# EAGLE board sdr_rx (EAGLE 9.6.1)
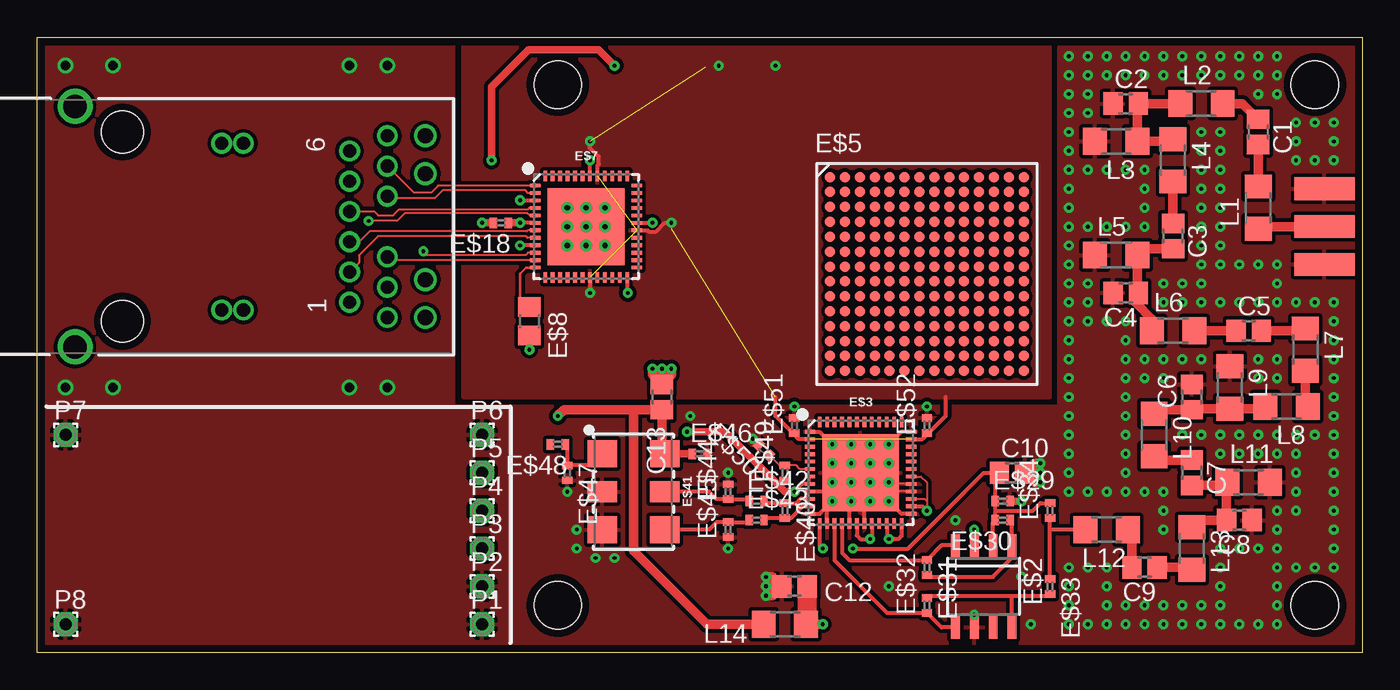
[diagram p0: board, top side]
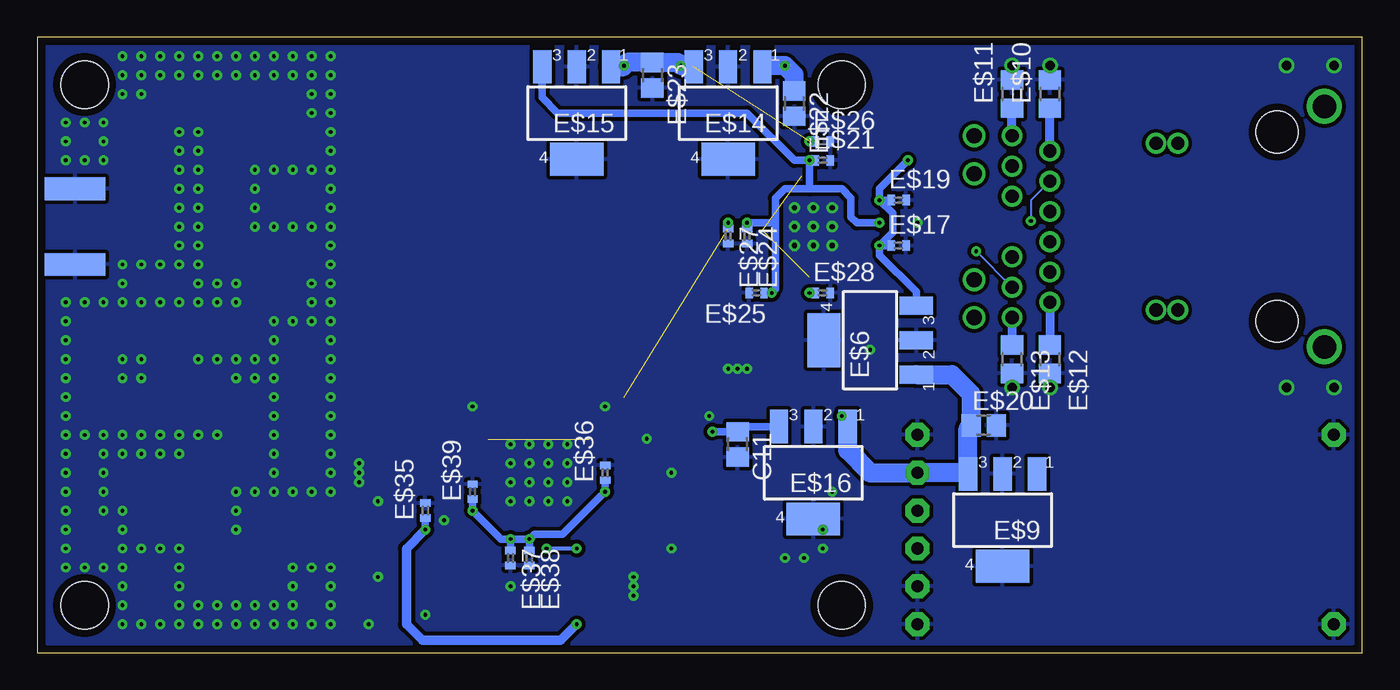
[diagram p1: board, bottom side, seen from below]

Size 88.9 x 41.27 mm. Coordinates in mm from the lower left corner, seen from the top.
Outline: 0,0 0,41.27 88.9,41.27 88.9,0 0,0
Copper layers (1*16): Top 0.035mm / dielectric 0.5mm / Bottom 0.035mm
Design rules "33each": minimum track width 5mil, minimum drill 10mil, track to track 5mil, track to pad 5mil, pad to pad 5mil, via to via 5mil, smd to smd 5mil, copper to edge 20mil, drill to drill 8mil, minimum pad ring 10mil, minimum via ring 8mil, stop-mask expansion 4mil, vias tented up to drill 0mil, thermal gap 10mil
Holes 3.17 mm at 34.92,38.1 34.92,3.17 85.72,38.1 85.72,3.17

## Footprints (pad centres in the part's own frame; a part is rotated, then mirrored left to right if it is on the bottom)
R0805 = smd 1.3 x 1.5: 1 -0.85,0; 2 0.85,0
SMA-EDGE = smd 1.524 x 4.064: GND@0 0,0; GND@1 5.08,0; SIG 2.54,0 | smd 1.524 x 4.064 bottom: GND@2 0,0; GND@3 5.08,0
SOIC8 = smd 0.6 x 1.5: 1 -1.905,-2.75; 2 -0.635,-2.75; 3 0.635,-2.75; 4 1.905,-2.75; 5 1.905,2.75; 6 0.635,2.75; 7 -0.635,2.75; 8 -1.905,2.75
QFN-48 = smd 0.7 x 0.25: 1 -3.4,2.75; 2 -3.4,2.25; 3 -3.4,1.75; 4 -3.4,1.25; 5 -3.4,0.75; 6 -3.4,0.25; 7 -3.4,-0.25; 8 -3.4,-0.75; 9 -3.4,-1.25; 10 -3.4,-1.75; 11 -3.4,-2.25; 12 -3.4,-2.75; 25 3.4,-2.75; 26 3.4,-2.25; 27 3.4,-1.75; 28 3.4,-1.25; 29 3.4,-0.75; 30 3.4,-0.25; 31 3.4,0.25; 32 3.4,0.75; 33 3.4,1.25; 34 3.4,1.75; 35 3.4,2.25; 36 3.4,2.75 | smd 0.25 x 0.7: 13 -2.75,-3.4; 14 -2.25,-3.4; 15 -1.75,-3.4; 16 -1.25,-3.4; 17 -0.75,-3.4; 18 -0.25,-3.4; 19 0.25,-3.4; 20 0.75,-3.4; 21 1.25,-3.4; 22 1.75,-3.4; 23 2.25,-3.4; 24 2.75,-3.4; 37 2.75,3.4; 38 2.25,3.4; 39 1.75,3.4; 40 1.25,3.4; 41 0.75,3.4; 42 0.25,3.4; 43 -0.25,3.4; 44 -0.75,3.4; 45 -1.25,3.4; 46 -1.75,3.4; 47 -2.25,3.4; 48 -2.75,3.4 | smd 5.15 x 5.15: EP 0,0
7499811420 = drill 0.89: 1 -5.075,-15.24; 2 -3.045,-15.24; 3 -1.015,-15.24; 4 1.015,-15.24; 5 3.045,-15.24; 6 5.075,-15.24; 7 -6.09,-17.78; 8 -4.06,-17.78; 9 -2.03,-17.78; 10 2.03,-17.78; 11 4.06,-17.78; 12 6.09,-17.78 | drill 0.89 pad 1.335: 13 -5.59,-8.12; 14 5.59,-8.12; 15 -5.59,-6.66; 16 5.59,-6.66 | drill 1.02: 17 -6.09,-20.32; 18 -3.555,-20.32; 19 3.555,-20.32; 20 6.09,-20.32 | drill 1.57: Z1 -8.065,3.18; Z2 8.065,3.18 | hole 2.8: -6.35,0; 6.35,0
PBGA196 = smd 0.7 x 0.7: A1 -6.5,6.5; A2 -5.5,6.5; A3 -4.5,6.5; A4 -3.5,6.5; A5 -2.5,6.5; A6 -1.5,6.5; A7 -0.5,6.5; A8 0.5,6.5; A9 1.5,6.5; A10 2.5,6.5; A11 3.5,6.5; A12 4.5,6.5; A13 5.5,6.5; A14 6.5,6.5; B1 -6.5,5.5; B2 -5.5,5.5; B3 -4.5,5.5; B4 -3.5,5.5; B5 -2.5,5.5; B6 -1.5,5.5; B7 -0.5,5.5; B8 0.5,5.5; B9 1.5,5.5; B10 2.5,5.5; B11 3.5,5.5; B12 4.5,5.5; B13 5.5,5.5; B14 6.5,5.5; C1 -6.5,4.5; C2 -5.5,4.5; C3 -4.5,4.5; C4 -3.5,4.5; C5 -2.5,4.5; C6 -1.5,4.5; C7 -0.5,4.5; C8 0.5,4.5; C9 1.5,4.5; C10 2.5,4.5; C11 3.5,4.5; C12 4.5,4.5; C13 5.5,4.5; C14 6.5,4.5; D1 -6.5,3.5; D2 -5.5,3.5; D3 -4.5,3.5; D4 -3.5,3.5; D5 -2.5,3.5; D6 -1.5,3.5; D7 -0.5,3.5; D8 0.5,3.5; D9 1.5,3.5; D10 2.5,3.5; D11 3.5,3.5; D12 4.5,3.5; D13 5.5,3.5; D14 6.5,3.5; E1 -6.5,2.5; E2 -5.5,2.5; E3 -4.5,2.5; E4 -3.5,2.5; E5 -2.5,2.5; E6 -1.5,2.5; E7 -0.5,2.5; E8 0.5,2.5; E9 1.5,2.5; E10 2.5,2.5; E11 3.5,2.5; E12 4.5,2.5; E13 5.5,2.5; E14 6.5,2.5; F1 -6.5,1.5; F2 -5.5,1.5; F3 -4.5,1.5; F4 -3.5,1.5; F5 -2.5,1.5; F6 -1.5,1.5; F7 -0.5,1.5; F8 0.5,1.5; F9 1.5,1.5; F10 2.5,1.5; F11 3.5,1.5; F12 4.5,1.5; F13 5.5,1.5; F14 6.5,1.5; G1 -6.5,0.5; G2 -5.5,0.5; G3 -4.5,0.5; G4 -3.5,0.5; G5 -2.5,0.5; G6 -1.5,0.5; G7 -0.5,0.5; G8 0.5,0.5; G9 1.5,0.5; G10 2.5,0.5; G11 3.5,0.5; G12 4.5,0.5; G13 5.5,0.5; G14 6.5,0.5; H1 -6.5,-0.5; H2 -5.5,-0.5; H3 -4.5,-0.5; H4 -3.5,-0.5; H5 -2.5,-0.5; H6 -1.5,-0.5; H7 -0.5,-0.5; H8 0.5,-0.5; H9 1.5,-0.5; H10 2.5,-0.5; H11 3.5,-0.5; H12 4.5,-0.5; H13 5.5,-0.5; H14 6.5,-0.5; J1 -6.5,-1.5; J2 -5.5,-1.5; J3 -4.5,-1.5; J4 -3.5,-1.5; J5 -2.5,-1.5; J6 -1.5,-1.5; J7 -0.5,-1.5; J8 0.5,-1.5; J9 1.5,-1.5; J10 2.5,-1.5; J11 3.5,-1.5; J12 4.5,-1.5; J13 5.5,-1.5; J14 6.5,-1.5; K1 -6.5,-2.5; K2 -5.5,-2.5; K3 -4.5,-2.5; K4 -3.5,-2.5; K5 -2.5,-2.5; K6 -1.5,-2.5; K7 -0.5,-2.5; K8 0.5,-2.5; K9 1.5,-2.5; K10 2.5,-2.5; K11 3.5,-2.5; K12 4.5,-2.5; K13 5.5,-2.5; K14 6.5,-2.5; L1 -6.5,-3.5; L2 -5.5,-3.5; L3 -4.5,-3.5; L4 -3.5,-3.5; L5 -2.5,-3.5; L6 -1.5,-3.5; L7 -0.5,-3.5; L8 0.5,-3.5; L9 1.5,-3.5; L10 2.5,-3.5; L11 3.5,-3.5; L12 4.5,-3.5; L13 5.5,-3.5; L14 6.5,-3.5; M1 -6.5,-4.5; M2 -5.5,-4.5; M3 -4.5,-4.5; M4 -3.5,-4.5; M5 -2.5,-4.5; M6 -1.5,-4.5; M7 -0.5,-4.5; M8 0.5,-4.5; M9 1.5,-4.5; M10 2.5,-4.5; M11 3.5,-4.5; M12 4.5,-4.5; M13 5.5,-4.5; M14 6.5,-4.5; N1 -6.5,-5.5; N2 -5.5,-5.5; N3 -4.5,-5.5; N4 -3.5,-5.5; N5 -2.5,-5.5; N6 -1.5,-5.5; N7 -0.5,-5.5; N8 0.5,-5.5; N9 1.5,-5.5; N10 2.5,-5.5; N11 3.5,-5.5; N12 4.5,-5.5; N13 5.5,-5.5; N14 6.5,-5.5; P1 -6.5,-6.5; P2 -5.5,-6.5; P3 -4.5,-6.5; P4 -3.5,-6.5; P5 -2.5,-6.5; P6 -1.5,-6.5; P7 -0.5,-6.5; P8 0.5,-6.5; P9 1.5,-6.5; P10 2.5,-6.5; P11 3.5,-6.5; P12 4.5,-6.5; P13 5.5,-6.5; P14 6.5,-6.5
SOT223 = smd 1.219 x 2.235: 1 -2.311,-3.099; 2 0,-3.099; 3 2.311,-3.099 | smd 3.6 x 2.2: 4 0,3.099
R0805' = smd 1.3 x 1.5: 1 -0.95,0; 2 0.95,0
R0402 = smd 0.5 x 0.7: 1 -0.5,0; 2 0.5,0
OSCILLATOR-SMD-7.5X5.2-6PIN = smd 1.8 x 2: 1 -2.54,-2.1; 2 2.54,-2.1; 3 2.54,2.1; 4 -2.54,2.1 | smd 1.4 x 2: NC0 0,-2.1; NC1 0,2.1
R1206 = smd 1.6 x 1.803: 1 -1.422,0; 2 1.422,0
1,6/0,8 = drill 0.813 pad 1.6 octagon: 1 0,0

## Placement (x,y rotation side)
C1  82p  [R0805]  81.92,34.92 270 top
C2  130p  [R0805]  73.03,36.83 0 top
C3  22p  [R0805]  76.2,27.94 270 top
C4  220p  [R0805]  73.03,24.13 180 top
C5  16p  [R0805]  81.28,21.59 0 top
C6  220p  [R0805]  77.47,17.14 90 top
C7  22p  [R0805]  77.47,12.06 270 top
C8  130p  [R0805]  80.64,8.89 180 top
C9  82p  [R0805]  74.3,5.71 180 top
C10  82p  [R0805]  65.41,12.06 0 top
C11  82p  [R0805]  41.91,13.97 270 bottom
C12  82p  [R0805]  50.8,4.45 180 top
C13  82p  [R0805]  41.91,17.14 90 top
E$1  [SMA-EDGE]  86.36,26.04 90 top
E$2  [SOIC8]  63.5,4.45 180 top
E$3  [QFN-48]  55.24,12.06 0 top
E$4  [7499811420]  5.71,28.57 90 top
E$5  [PBGA196]  59.69,25.4 0 top
E$6  [SOT223]  33.02,20.95 90 bottom
E$7  [QFN-48]  36.83,28.57 0 top
E$8  [R0805']  33.02,22.23 270 top
E$9  [SOT223]  24.13,8.89 180 bottom
E$10  [R0805']  20.95,37.47 90 bottom
E$11  [R0805']  23.5,37.47 90 bottom
E$12  [R0805']  20.95,19.68 270 bottom
E$13  [R0805']  23.5,19.68 270 bottom
E$14  [SOT223]  42.55,36.2 180 bottom
E$15  [SOT223]  52.7,36.2 180 bottom
E$16  [SOT223]  36.83,12.06 180 bottom
E$17  [R0402]  31.11,27.3 0 bottom
E$18  [R0402]  31.11,28.83 180 top
E$19  [R0402]  31.11,30.35 0 bottom
E$20  [R0805]  25.4,15.24 0 bottom
E$21  [R0402]  36.2,33.02 0 bottom
E$22  [R0805]  38.1,36.83 270 bottom
E$23  [R0805]  47.62,38.73 270 bottom
E$24  [R0402]  41.27,27.94 270 bottom
E$25  [R0402]  40.64,24.13 180 bottom
E$26  [R0402]  36.2,34.29 0 bottom
E$27  [R0402]  42.55,27.94 270 bottom
E$28  [R0402]  36.2,24.13 0 bottom
E$29  [R0402]  64.77,10.16 0 top
E$30  [R0402]  64.77,8.89 180 top
E$31  [R0402]  59.69,5.71 270 top
E$32  [R0402]  59.69,3.17 90 top
E$33  [R0402]  67.94,4.45 270 top
E$34  [R0402]  67.94,9.53 90 top
E$35  [R0402]  62.87,9.53 90 bottom
E$36  [R0402]  50.8,12.06 90 bottom
E$37  [R0402]  57.15,6.35 270 bottom
E$38  [R0402]  55.88,6.35 270 bottom
E$39  [R0402]  59.69,10.79 90 bottom
E$40  [R0402]  50.16,9.53 270 top
E$41  [OSCILLATOR-SMD-7.5X5.2-6PIN]  40.01,10.79 270 top
E$42  [R0402]  48.26,10.16 0 top
E$43  [R0402]  48.26,8.89 0 top
E$44  [R0402]  46.35,10.79 90 top
E$45  [R0402]  46.35,8.26 90 top
E$46  [R0402]  44.45,13.34 0 top
E$47  [R0402]  35.56,12.06 270 top
E$48  [R0402]  34.92,13.97 180 top
E$49  [R0402]  50.16,12.06 90 top
E$50  [R0402]  48.77,13.59 135 top
E$51  [R0402]  50.8,15.24 90 top
E$52  [R0402]  59.69,15.24 90 top
L1  47n  [R1206]  81.92,29.84 90 top
L2  82n  [R1206]  78.11,36.83 0 top
L3  82n  [R1206]  72.39,34.29 180 top
L4  470n  [R1206]  76.2,33.02 270 top
L5  47n  [R1206]  72.39,26.67 0 top
L6  100n  [R1206]  76.2,21.59 0 top
L7  220n  [R1206]  85.09,20.32 270 top
L8  330n  [R1206]  83.82,16.51 180 top
L9  47n  [R1206]  80.01,17.78 270 top
L10  470n  [R1206]  74.93,14.61 270 top
L11  82n  [R1206]  81.28,11.43 0 top
L12  82n  [R1206]  71.75,8.26 180 top
L13  47n  [R1206]  77.47,6.99 270 top
L14  82n  [R1206]  50.16,1.91 180 top
P1  [1,6/0,8]  29.84,1.91 0 top
P2  [1,6/0,8]  29.84,4.45 0 top
P3  [1,6/0,8]  29.84,6.99 0 top
P4  [1,6/0,8]  29.84,9.53 0 top
P5  [1,6/0,8]  29.84,12.06 0 top
P6  [1,6/0,8]  29.84,14.61 0 top
P7  [1,6/0,8]  1.91,14.61 0 top
P8  [1,6/0,8]  1.91,1.91 0 top

## Library data of the parts
C1-C13 E$17-E$40 E$42-E$52 = BeagleBone_Black_Wireless
E$1 = SparkFun-Retired
E$2 = linear
E$3 E$7 = SparkFun-IC-Microcontroller
E$4 = Wurth_Elektronik_Passive_rev19e
E$5 = micro-intel
E$6 E$9 E$14-E$16 = transistor
E$8 E$10-E$13 L1-L14 = rcl
E$41 = SparkFun-Clocks
P1-P8 = wirepad

## Nets
GND: C2.1 C4.2 C6.2 C8.1 C10.2 C11.2 C12.2 C13.2 E$1.GND@0 E$1.GND@1 E$1.GND@2 E$1.GND@3 E$2.6 E$3.1 E$3.9 E$3.12 E$3.14 E$3.17 E$3.19 E$3.25 E$3.28 E$3.29 E$3.36 E$3.EP E$6.2 E$6.4 E$7.EP E$8.2 E$9.2 E$9.4 E$10.2 E$11.2 E$12.2 E$13.2 E$14.2 E$14.4 E$15.2 E$15.4 E$16.2 E$16.4 E$17.2 E$18.2 E$19.2 E$20.2 E$21.2 E$22.2 E$23.2 E$24.2 E$25.2 E$26.2 E$27.2 E$28.2 E$29.2 E$35.2 E$36.2 E$37.2 E$38.2 E$39.2 E$41.2 E$41.NC0 E$44.2 E$45.1 E$46.2 E$47.2 E$50.2 E$51.2 E$52.2 L3.2 L5.1 L9.1 L11.2 P1.1 P2.1 P6.1 P7.1 P8.1
S$1: E$4.11 E$7.1
S$2: E$4.10 E$7.2
S$3: E$4.4 E$7.4
S$4: E$1.SIG L1.1
S$6: E$4.5 E$7.5
S$7: E$4.3 E$7.7
S$8: E$4.2 E$7.8
S$9: E$4.8 E$7.10
S$10: E$4.9 E$7.11
S$11: E$7.12 E$8.1
S$12: C10.1 E$2.2 E$3.13 E$29.1 E$30.2 E$34.2
S$13: E$4.6 E$10.1
S$14: E$4.12 E$11.1
S$15: E$4.1 E$12.1
S$16: E$4.7 E$13.1
S$17: C1.2 L1.2
S$18: C1.1 L2.2
S$19: C2.2 L2.1 L3.1 L4.1
S$20: C3.1 L4.2
S$21: C3.2 C4.1 L5.2 L6.1
S$22: C5.1 L6.2
S$23: C5.2 L7.1
S$24: L7.2 L8.1
S$25: C6.1 L8.2 L9.2 L10.1
S$26: C7.1 L10.2
S$27: C7.2 C8.2 L11.1 L13.1
S$28: C9.1 L13.2
S$29: C9.2 L12.1
S$30: E$2.5 E$3.15 E$32.1
S$31: E$2.4 E$3.16 E$31.1
S$32: E$2.1 E$30.1 E$31.2
S$33: E$2.8 E$32.2 E$33.2
S$34: E$33.1 E$34.1 L12.2
S$35: E$41.3 E$43.1 E$45.2
S$36: E$41.NC1 E$42.1 E$44.1
S$37: E$3.10 E$40.1 E$42.2
S$38: E$3.11 E$40.2 E$43.2
S$39: E$41.1 E$47.1 E$48.1
S$41: E$3.6 E$49.2 E$50.1
V1.1: E$7.6 E$7.24 E$7.31 E$7.42 E$15.3 E$18.1 E$21.1 E$24.1 E$25.1
V1.8: E$3.2 E$3.35 E$7.19 E$7.30 E$7.41 E$14.3 E$15.1 E$23.1 E$26.1 E$27.1 E$28.1 E$51.1 E$52.1
V1.8A: C11.1 E$3.7 E$3.8 E$3.18 E$3.20 E$3.22 E$3.24 E$3.26 E$3.27 E$3.30 E$16.3 E$36.1 E$37.1 E$38.1 E$39.1 E$49.1
V2.5: E$6.3 E$7.3 E$7.9 E$14.1 E$17.1 E$19.1 E$22.1
V3.3: C13.1 E$6.1 E$9.3 E$16.1 E$20.1 E$41.4 E$46.1 L14.2 P5.1
V3.3A: C12.1 E$2.3 E$35.1 L14.1

## Tracks (layer width: path | path; a pad name or v marks a point on that pad's centre or on a via)
GND  (via drill 0.25, 0.35, 0.64)
  Top 0.127: E$3.29 57.27,11.31 | 57.27,11.31 v57.15,11.43 | E$3.28 57.77,10.81 57.27,11.31
  Top 0.254: E$3.1 52.49,14.81 v53.34,13.97 | E$3.36 57.99,14.81 v57.15,13.97 | E$3.25 57.99,9.31 v57.15,10.16 | E$3.19 55.49,9.78 v55.88,10.16 | E$3.17 54.49,10.04 v54.61,10.16 | E$3.14 52.99,9.81 v53.34,10.16 52.49,9.31 E$3.12 | E$3.9 53.32,10.81 53.34,10.79 v53.34,11.43
  Top 0.508: E$18.2 v29.84,28.83 | E$29.2 v66.04,10.16 | E$2.6 v62.87,2.54 | E$3.EP v54.61,11.43 | E$8.2 v33.02,20.32
  Top 0.635: C10.2 v67.31,12.06 | C10.2 66.89,12.7 v67.31,12.7 | C10.2 66.89,11.43 v67.31,11.43 | C12.2 49.31,5.08 v48.9,5.08 | C12.2 v48.9,4.45 | C12.2 49.31,3.81 v48.9,3.81 | C13.2 v41.91,19.05 | C13.2 41.27,18.63 v41.27,19.05 | C13.2 42.55,18.63 v42.55,19.05
  other vias: 35.56,29.84 36.83,29.84 38.1,29.84 35.56,28.57 36.83,28.57 38.1,28.57 38.1,27.3 36.83,27.3 35.56,27.3 20.95,39.37 23.5,39.37 20.95,17.78 23.5,17.78 70.48,37.47 70.48,36.2 70.48,38.73 71.75,38.73 73.03,38.73 74.3,38.73 75.56,38.73 76.83,38.73 78.11,38.73 79.38,38.73 80.64,38.73 81.92,38.73 81.92,37.47 83.19,37.47 84.45,35.56 84.45,34.29 84.45,33.02 85.72,33.02 87,33.02 69.22,36.2 69.22,34.92 69.22,33.66 69.22,32.38 70.48,32.38 71.75,32.38 73.03,32.38 74.3,32.38 74.3,31.11 74.3,29.84 74.3,28.57 73.03,28.57 71.75,28.57 70.48,28.57 69.22,28.57 69.22,27.3 69.22,26.04 69.22,24.77 70.48,24.77 70.48,23.5 70.48,22.23 71.75,22.23 73.03,22.23 78.11,34.92 79.38,34.92 78.11,33.66 78.11,32.38 78.11,31.11 78.11,29.84 78.11,28.57 78.11,27.3 78.11,26.04 78.11,24.77 78.11,23.5 76.83,24.77 75.56,24.77 75.56,23.5 76.83,23.5 79.38,33.66 79.38,32.38 79.38,31.11 79.38,29.84 79.38,28.57 79.38,27.3 79.38,26.04 79.38,23.5 69.22,31.11 69.22,29.84 69.22,37.47 69.22,38.73 69.22,40.01 70.48,40.01 71.75,40.01 73.03,40.01 74.3,40.01 75.56,40.01 76.83,40.01 78.11,40.01 79.38,40.01 80.64,40.01 81.92,40.01 83.19,40.01 83.19,38.73 85.72,35.56 87,35.56 87,34.29 80.64,26.04 81.92,26.04 83.19,26.04 83.19,24.77 83.19,23.5 84.45,23.5 85.72,23.5 87,23.5 87,22.23 80.64,23.5 81.92,23.5 69.22,23.5 69.22,22.23 69.22,20.95 69.22,19.68 69.22,18.41 69.22,17.14 69.22,15.88 69.22,14.61 69.22,13.34 69.22,12.06 69.22,10.79 70.48,10.79 73.03,20.95 73.03,19.68 74.3,19.68 75.56,19.68 76.83,19.68 78.11,19.68 71.75,10.79 73.03,18.41 73.03,17.14 73.03,15.88 73.03,14.61 73.03,13.34 73.03,12.06 73.03,10.79 74.3,10.79 75.56,10.79 75.56,9.53 75.56,8.26 74.3,18.41 75.56,18.41 87,20.95 87,19.68 87,18.41 87,17.14 87,15.88 87,14.61 85.72,14.61 84.45,14.61 83.19,14.61 81.92,14.61 83.19,18.41 83.19,19.68 81.92,19.68 81.92,18.41 80.64,14.61 79.38,14.61 78.11,14.61 76.83,14.61 79.38,13.34 80.64,13.34 81.92,13.34 83.19,13.34 84.45,13.34 87,13.34 87,12.06 87,10.79 87,9.53 87,8.26 87,6.99 87,5.71 85.72,5.71 84.45,5.71 83.19,5.71 83.19,4.45 83.19,3.17 83.19,1.91 81.92,1.91 80.64,1.91 79.38,1.91 78.11,1.91 76.83,1.91 75.56,1.91 74.3,1.91 73.03,1.91 71.75,1.91 70.48,1.91 69.22,1.91 69.22,3.17 69.22,4.45 69.22,5.71 70.48,5.71 71.75,5.71 71.75,4.45 71.75,3.17 73.03,3.17 74.3,3.17 75.56,3.17 76.83,3.17 78.11,3.17 79.38,3.17 79.38,4.45 79.38,5.71 79.38,6.99 80.64,6.99 81.92,6.99 83.19,6.99 83.19,8.26 83.19,9.53 84.45,9.53 84.45,10.79 84.45,12.06 1.91,39.37 1.91,17.78 5.08,17.78 5.08,39.37 54.61,13.97 55.88,13.97 57.15,12.7 55.88,12.7 54.61,12.7 53.34,12.7 55.88,11.43 57.15,4.45 61.59,8.89 66.67,1.91 66.04,5.08 36.2,8.26 37.47,6.35 36.2,6.99 38.73,6.35 43.81,15.88 35.56,10.79 48.01,14.35 46.35,6.99 46.35,12.06 50.8,16.51 59.69,16.51
  pour Top (isolate 0.254): 68.58,0.64 68.58,40.64 88.27,40.64 88.27,0.64
  pour Bottom (isolate 0.254): 0.64,40.64 88.27,40.64 88.27,0.64 0.64,0.64
  pour Top (isolate 0.254): 0.64,40.64 0.64,0.64 31.75,0.64 31.75,16.51 27.94,16.51 27.94,40.64
  pour Top (isolate 0.254): 27.94,16.51 27.94,0.64 69.85,0.64 69.85,16.51
S$1
  Top 0.127: E$4.11 25.27,30.86 26.42,30.86 26.88,31.32 E$7.1
S$2
  Top 0.127: E$4.10 23.62,30.48 26.67,30.48 27.19,31 32.75,31 32.93,30.82 E$7.2
S$3
  Top 0.127: E$4.4 22.61,29.59 22.86,29.34 23.88,29.34 24.26,29.72 32.89,29.72 33,29.82 E$7.4
S$4
  Top 0.635: E$1.SIG 82.07,28.57 L1.1
S$6  (via drill 0.25)
  Top 0.127: v22.23,28.96 24.13,28.96 24.64,29.46 32.89,29.46 33.03,29.32 E$7.5
  Bottom 0.127: E$4.5 22.23,30.35 v22.23,28.96
S$7
  Top 0.127: E$4.3 21.59,27.56 22.29,28.26 32.83,28.26 32.9,28.32 E$7.7
S$8
  Top 0.127: E$4.2 21.59,26.16 21.59,26.67 22.86,27.94 32.77,27.94 32.88,27.82 E$7.8
S$9  (via drill 0.25)
  Top 0.127: E$7.10 32.92,26.82 32.77,26.67 26.16,26.67 26.01,26.82
  Top 0.152: 26.01,26.82 v25.91,26.92
  Bottom 0.127: E$4.8 v25.9,26.92
  Bottom 0.152: v25.9,26.92 v25.91,26.92
S$10
  Top 0.127: E$4.9 23.71,26.32 E$7.11
S$11
  Top 0.152: E$7.12 32.81,25.82 32.38,25.4 32.38,23.5 32.7,23.18 E$8.1
S$12  (via drill 0.25)
  Top 0.254: E$2.2 64.14,8.76 E$30.2 64.27,9.53 | 64.27,9.53 E$29.1 64.27,11.78 64.34,11.86 | 64.34,11.86 C10.1 | E$34.2 67.31,10.03 66.81,9.53 64.27,9.53 | E$3.13 52.49,7.2 v52.7,6.99 | v54.74,6.99 58.42,6.99 63.5,12.06 64.14,12.06 64.34,11.86
  Bottom 0.254: v52.7,6.99 v54.74,6.99
S$13
  Bottom 0.61: E$4.6 E$10.1
S$14
  Bottom 0.61: E$4.12 E$11.1
S$15
  Bottom 0.61: E$4.1 E$12.1
S$16
  Bottom 0.61: E$4.7 E$13.1
S$17
  Top 0.635: L1.2 C1.2
S$18
  Top 0.635: C1.1 80.86,36.83 L2.2
S$19
  Top 0.635: L2.1 C2.2 73.81,36.77 L3.1 76.05,34.29 L4.1
S$20
  Top 0.635: L4.2 C3.1
S$21
  Top 0.635: C3.2 74.23,27.09 L5.2 73.81,24.19 | 73.81,24.19 C4.1 | L6.1 74.78,22.38 73.66,23.5 73.66,24.04 73.81,24.19
S$22
  Top 0.635: L6.2 C5.1
S$23
  Top 0.635: C5.2 84.94,21.59 L7.1
S$24
  Top 0.635: L7.2 85.09,16.66 L8.1
S$25
  Top 0.635: L8.2 82.25,16.36 L9.2 77.53,16.36 C6.1 75.2,16.3 L10.1
S$26
  Top 0.635: C7.1 75.2,12.91 L10.2
S$27
  Top 0.635: C7.2 79.64,11.21 L11.1 79.8,11.37 C8.2 77.95,8.89 L13.1
S$28
  Top 0.635: C9.1 77.32,5.71 L13.2
S$29
  Top 0.635: C9.2 73.44,7.99 L12.1
S$30
  Top 0.254: E$3.15 53.49,6.2 57.02,2.67 E$32.1 60.67,1.7 E$2.5
S$31
  Top 0.254: E$3.16 53.99,6.71 54.49,6.21 E$31.1 60.67,7.2 E$2.4
S$32
  Top 0.254: E$30.1 65.41,8.76 E$2.1 65.41,6.35 64.14,5.08 59.83,5.08 E$31.2
S$33
  Top 0.254: E$32.2 59.83,3.81 65.41,3.81 | E$33.2 67.81,3.81 65.41,3.81 | E$2.8 65.41,3.81
S$34
  Top 0.254: E$33.1 67.94,8.26 | 67.94,8.26 E$34.1 | L12.2 67.94,8.26
S$35
  Top 0.254: E$43.1 47.62,8.76 E$45.2 45.59,8.76 45.09,8.26 E$41.3
S$36
  Top 0.254: E$42.1 47.62,10.29 E$44.1 45.59,10.29 45.09,10.79 E$41.NC1
S$37
  Top 0.254: E$42.2 48.9,10.03 E$40.1 50.17,10.03 50.93,10.03 51.21,10.31 E$3.10
S$38
  Top 0.254: E$3.11 51.34,9.81 50.55,9.03 E$40.2 48.9,9.03 E$43.2
S$39
  Top 0.254: E$41.1 37.13,12.56 E$47.1 35.56,13.84 E$48.1
S$41
  Top 0.127: E$3.6 51.19,12.31 50.93,12.57 50.17,12.57 | E$49.2 49.79,12.56 E$50.1
  Top 0.254: 50.17,12.57 E$49.2
V1.1  (via drill 0.25)
  Top 0.254: E$7.6 v32.39,28.82 | E$7.31 v41.27,28.82 v41.27,28.83 | E$7.42 v37.08,33.02 | E$7.24 39.58,24.17 v39.62,24.13
  Top 0.508: E$18.1 v32.38,28.83 v32.39,28.82
  Bottom 0.508: v32.38,28.83 33.91,28.83 34.29,29.21 34.29,30.48 34.92,31.11 37.08,31.11 | 37.08,31.11 38.73,31.11 39.37,30.48 39.37,28.83 | 39.37,28.83 39.37,24.38 v39.62,24.13 E$25.1 | 39.37,28.83 v41.27,28.83 E$24.1 | v37.08,33.02 37.08,31.11 | E$21.1 v37.08,33.02 | v37.08,33.02 38.1,33.02 41.27,36.2 53.98,36.2 55.02,37.24 E$15.3
V1.8  (via drill 0.25)  (5 unrouted)
  Top 0.254: v37.08,34.29 37.08,33.85 37.67,33.26 37.67,32.78 37.58,32.69 E$7.41 | v42.55,28.83 42.1,28.83 41.52,28.25 41.03,28.25 40.95,28.32 E$7.30 | E$7.19 v37.08,24.13 | E$3.35 59.4,14.31 59.69,14.61 | 59.69,14.61 60.96,15.88 60.96,17.14 | E$3.2 51.09,14.31 50.8,14.61 | 50.8,14.61 49.53,15.88 49.53,17.14 | E$51.1 50.8,14.61 | E$52.1 59.69,14.61
  Bottom 0.508: E$26.1 v37.08,34.29 | E$27.1 v42.55,28.83 | E$28.1 v37.08,24.13
  Bottom 1.27: E$15.1 49.61,39.29 v49.53,39.37 49.31,39.59 E$23.1 45.94,39.59 v45.72,39.37 44.93,39.37 E$14.3
  pour Top (isolate 0.254): 28.57,40.64 28.57,17.14 67.94,17.14 67.94,40.64
V1.8A  (via drill 0.25)
  Top 0.127: E$3.30 59.3,11.81 59.69,11.43 59.69,10.16 | 59.69,10.16 v59.69,9.53 | E$3.27 59.53,10.31 59.69,10.16 | E$3.8 E$3.7
  Top 0.254: E$3.8 51.32,11.31 v50.8,10.79 | E$3.26 59.4,9.81 v59.69,9.53 | E$3.24 57.99,7.83 57.78,7.62 v57.15,7.62 56.99,7.78 E$3.22 | E$3.20 55.99,7.74 v55.88,7.62 55.24,7.62 54.99,7.87 E$3.18
  Top 0.508: v50.8,10.79 50.16,10.79 49.85,11.11 | 49.85,11.11 46.14,14.82 v43.6,14.82 | E$49.1 49.85,11.25 49.85,11.11
  Bottom 0.508: E$39.1 v59.69,9.53 57.78,7.62 v57.15,7.62 | E$36.1 v50.8,10.79 53.65,7.95 55.54,7.95 v55.87,7.62 v55.88,7.62 | E$38.1 v55.88,7.62 | E$37.1 v57.15,7.62 | v57.15,7.62 v55.88,7.62 | E$16.3 41.57,15.16 C11.1 v43.6,14.82
V2.5  (via drill 0.25)
  Top 0.254: E$7.3 32.41,30.32 v32.38,30.35 | E$7.9 32.41,27.32 v32.38,27.3
  Top 0.508: v30.48,33.02 30.48,37.97 32.96,40.45 37.66,40.45 v38.73,39.37
  Bottom 0.508: v32.38,27.3 31.5,28.19 31.5,29.46 v32.38,30.35 | v32.38,27.3 32.38,26.67 29.92,24.21 E$6.3 | v32.38,30.35 32.38,31.11 v30.48,33.02 | 40.16,39.37 E$14.1 | E$17.1 v32.38,27.3 | E$19.1 v32.38,30.35
  Bottom 1.27: 40.16,39.37 v38.73,39.37 38.1,38.73 E$22.1
V3.3  (via drill 0.25)
  Top 0.508: E$46.1 E$41.4
  Top 0.635: 40.01,16.3 C13.1 41.91,13.53 E$41.4 | 40.01,16.3 35.34,16.3 v34.92,15.88 | 40.01,16.3 40.01,6.83 44.93,1.91 L14.2
  Bottom 0.635: E$16.1 34.52,15.47 v34.92,15.88
  Bottom 1.27: E$16.1 34.52,13.56 33.02,12.06 P5.1 26.52,12.06 E$9.3 26.44,15.05 E$20.1 26.25,17.36 27.53,18.64 E$6.1
V3.3A  (via drill 0.25)
  Top 0.508: E$2.3 v62.87,8.26
  Top 0.635: L14.1 v52.7,1.91
  Top 1.27: C12.1 51.65,1.97 L14.1
  Bottom 0.508: E$35.1 v62.87,8.26
  Bottom 0.635: v62.87,8.26 64.14,6.99 64.14,1.91 63.06,0.83 53.78,0.83 v52.7,1.91